# Altium PCB micromouse_v1.PcbDoc
Units mm, origin at the board's own origin, x right, y up, seen from the top; angles counter-clockwise.
Board outline 113.41 x 84.33 mm, 2 copper layers (Top Layer, Bottom Layer); 27 components, 49 nets, 128 pads, 21 vias.
Unrouted connection lines stored in the file: 73.
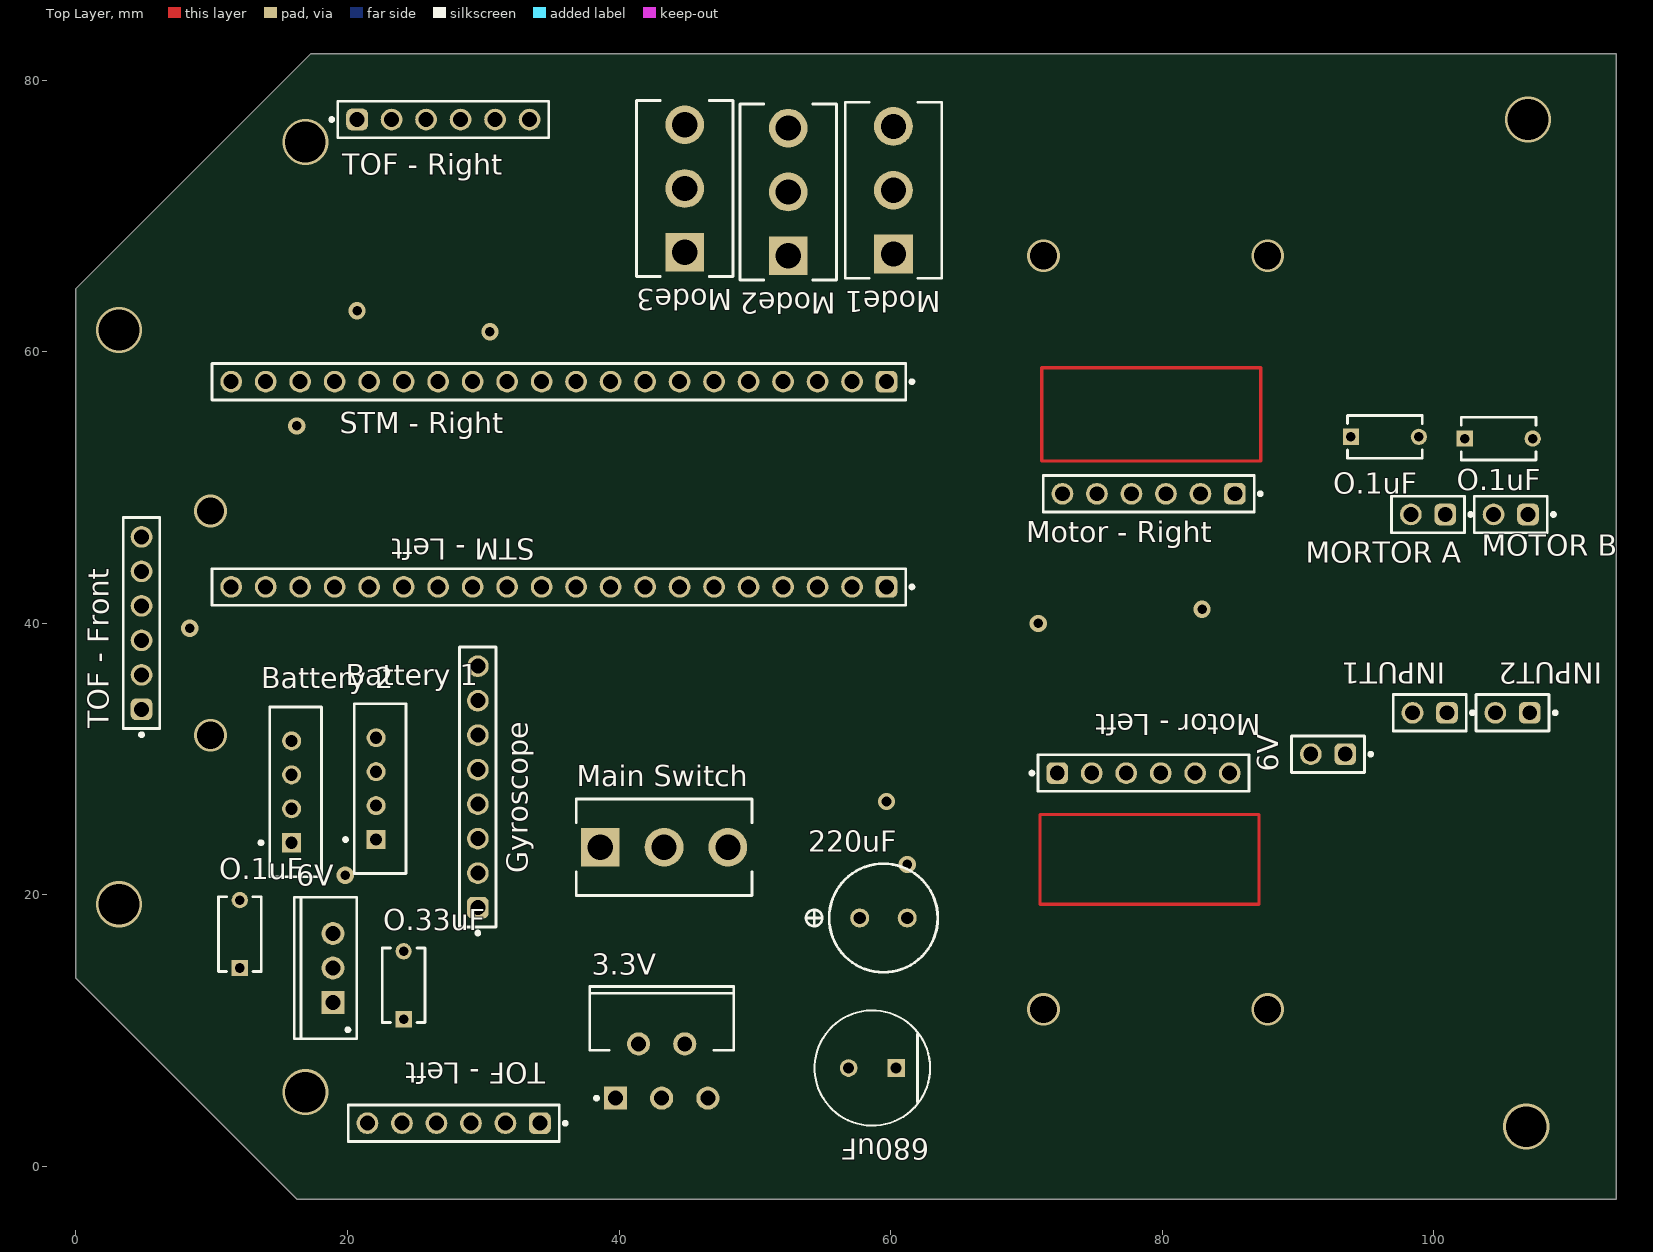
[diagram p0: Top Layer view]
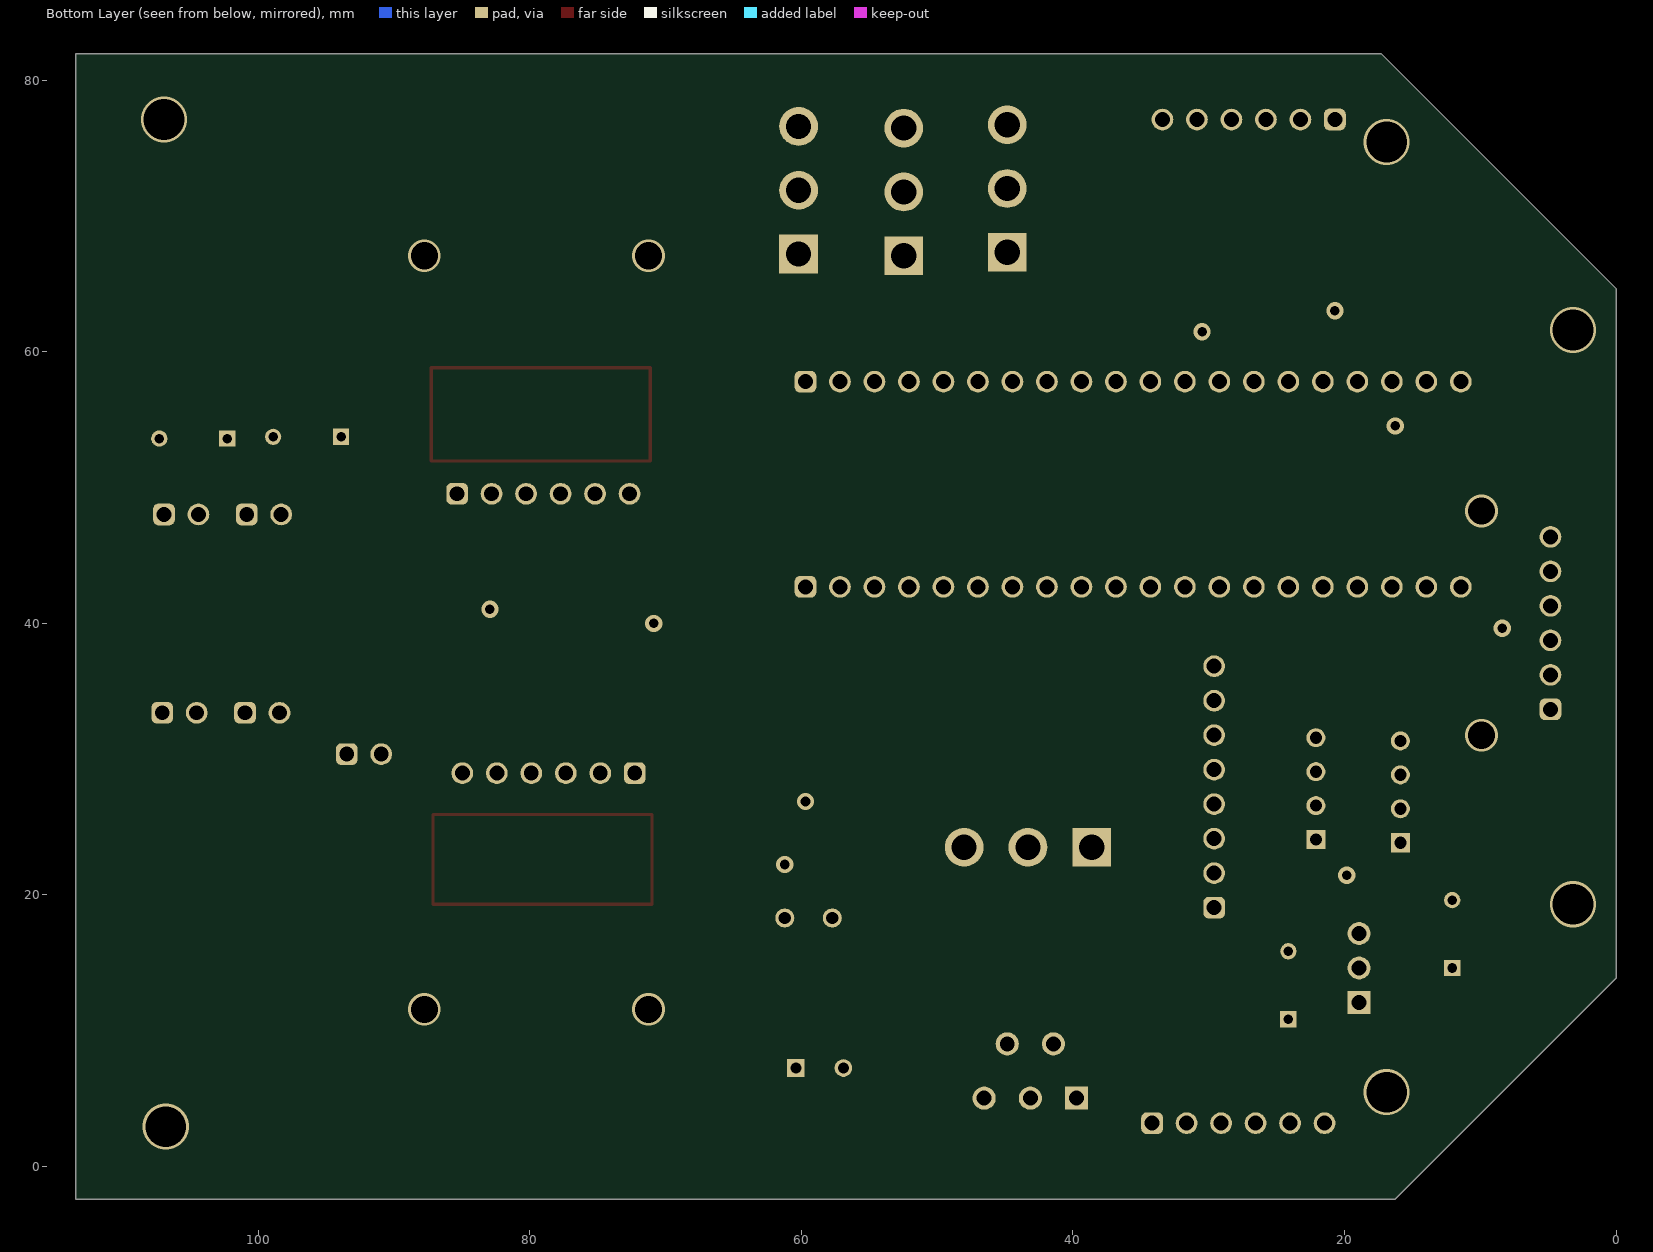
[diagram p1: Bottom Layer view, seen from below]

## Layer stack, top to bottom
Top Solder: solder mask 0.0102, Solder Resist, Dk 3.5
Top Layer: signal copper 0.0356
Dielectric 1: dielectric 0.32, FR-4, Dk 4.8
Bottom Layer: signal copper 0.0356
Bottom Solder: solder mask 0.0102, Solder Resist, Dk 3.5

## Board outline
16.256,-2.413 113.411,-2.413 113.411,81.915 17.272,81.915 0,64.643 0,13.843

## Design rules (kind name [scope] priority, off if disabled: settings)
Clearance [All] p1: gap=0.254 ignorepadtopadclearanceinfootprint=FALSE ismatrix=TRUE
PolygonConnect [All] p1: connectstyle=Relief reliefconductorwidth=0.254 reliefentries=4 polygonreliefangle="90 Angle" airgapwidth=0.254
RoutingVias [All] p1: holewidth=0.711 width=1.27 viastyle="Through Hole" minholewidth=0.711 minwidth=1.27 maxholewidth=0.711 maxwidth=1.27
SolderMaskExpansion [All] p1: expansion=0.102 istentingtop=FALSE
Width MaxMinWidth_2 [All] p1: maxlimit=1.3 minlimit=1.3 preferedwidth=1.3 minimp=50.000000 maximp=50.000000 favimp=50.000000
30 further rules are at their usual default settings.

## Components (designator, comment, footprint, x,y, rotation, side; value= is the part's Value field where it differs from the comment)
3.3V "LM2596T-3.3" T05D 43.131,7.017 r0 top
6V "P" 61300211121 92.202,30.353 r180 top
6V "L7806CV" TO220 18.923,14.605 r90 top
220uF "EEU-FR1C102L" PNSC-FR-A-8X20-2_V 59.464,18.288 r0 top
680uF "EEUFR1A681" FP-RAD-TH-D_8_0_5-L_11_5-MFG 58.646,7.239 r180 top
"Battery 1" "B4B-EH-A(LF)(SN)" JST-B4B-EH-A_V 22.098,27.813 r90 top
"Battery 2" "B4B-EH-A(LF)(SN)" JST-B4B-EH-A_V 15.875,27.579 r90 top
Gyroscope "Gyro" 61300811121 29.591,27.94 r90 top
INPUT1 "61300211121" 61300211121 99.695,33.401 r180 top
INPUT2 "61300211121" 61300211121 105.791,33.401 r180 top
"Main Switch" "A101SYCB04" FP-A101SYCB04-MFG 43.307,23.495 r90 top
Mode1 "A101SYCB04" FP-A101SYCB04-MFG 60.198,71.882 r180 top
Mode2 "A101SYCB04" FP-A101SYCB04-MFG 52.451,71.755 r180 top
Mode3 "A101SYCB04" FP-A101SYCB04-MFG 44.831,72.009 r180 top
"MORTOR A" "61300211121" 61300211121 99.568,48.006 r180 top
"Motor - Left" "ML" 61300611121 78.613,28.956 r0 top
"Motor - Right" "MR" 61300611121 78.994,49.53 r180 top
"MOTOR B" "61300211121" 61300211121 105.664,48.006 r180 top
O.1uF "RCER72A105K2M1H03A" FP-RCE2K1-MFG 12.065,17.105 r90 top
O.1uF "ML Cap" FP-RCE2K1-MFG 96.393,53.721 r0 top
O.1uF "MR Cap" FP-RCE2K1-MFG 104.775,53.594 r0 top
O.33uF "RCER72A105K2M1H03A" FP-RCE2K1-MFG 24.13,13.335 r90 top
"STM - Left" "61302011121" 61302011121 35.56,42.672 r180 top
"STM - Right" "61302011121" 61302011121 35.56,57.785 r180 top
"TOF - Front" "TF" 61300611121 4.826,40.005 r90 top
"TOF - Left" "TL" 61300611121 27.813,3.175 r180 top
"TOF - Right" "TR" 61300611121 27.051,77.089 r0 top

## Footprints (in the part's own frame and the unit in brackets; to place one, negate y for a bottom-side part, rotate by r counter-clockwise, add the part's x,y. Pads: shape width x height; smd on the part's side, far side on the other; paste and mask are expansions set on the pad)
61300211121 [mm] "Pin Header, pitch 2.54 mm, THT, Vertical, single row, 2p"
  rrect50% 1.6x1.6 hole 1.1: 1(-1.27,0)
  round 1.6 hole 1.1: 2(1.27,0)
  silkscreen extent -3.26,-1.35 2.69,1.35, body extent -2.54,-1.27 2.54,1.27, height 8.57
61300611121 [mm] "Pin Header, pitch 2.54 mm, THT, Vertical, single row, 6p"
  rrect50% 1.6x1.6 hole 1.1: 1(-6.35,0)
  round 1.6 hole 1.1: 2(-3.81,0) 3(-1.27,0) 4(1.27,0) 5(3.81,0) 6(6.35,0)
  silkscreen extent -8.34,-1.35 7.77,1.35, body extent -7.62,-1.27 7.62,1.27, height 8.57
61300811121 [mm] "Pin Header, pitch 2.54 mm, THT, Vertical, single row, 8p"
  rrect50% 1.6x1.6 hole 1.1: 1(-8.89,0)
  round 1.6 hole 1.1: 2(-6.35,0) 3(-3.81,0) 4(-1.27,0) 5(1.27,0) 6(3.81,0) 7(6.35,0) 8(8.89,0)
  silkscreen extent -10.88,-1.35 10.31,1.35, body extent -10.16,-1.27 10.16,1.27, height 8.57
61302011121 [mm] "Pin Header, pitch 2.54 mm, THT, Vertical, single row, 20p"
  rrect50% 1.6x1.6 hole 1.1: 1(-24.13,0)
  round 1.6 hole 1.1: 2(-21.59,0) 3(-19.05,0) 4(-16.51,0) 5(-13.97,0) 6(-11.43,0) 7(-8.89,0) 8(-6.35,0) 9(-3.81,0) 10(-1.27,0) 11(1.27,0) 12(3.81,0) 13(6.35,0) 14(8.89,0) 15(11.43,0) 16(13.97,0) 17(16.51,0) 18(19.05,0) 19(21.59,0) 20(24.13,0)
  silkscreen extent -26.12,-1.35 25.55,1.35, body extent -25.4,-1.27 25.4,1.27, height 8.57
FP-A101SYCB04-MFG [mil]
  rect 112.37x112.37 hole 73 paste-99999 mask+0: 1(0,185)
  round 112.37 hole 73 paste-99999 mask+0: 2(0,0) 3(0,-185)
  silkscreen extent -140,-255 140,255, body extent -144,-259 144,259, height 10
FP-RAD-TH-D_8_0_5-L_11_5-MFG [mm]
  rect 1.3x1.3 hole 0.8 paste-2539.97 mask+0: 1(-1.75,0)
  round 1.3 hole 0.8 paste-2539.97 mask+0: 2(1.75,0)
  silkscreen extent -4.25,-4.25 4.25,4.25, body extent -4.35,-4.35 4.35,4.35, height 0.25
FP-RCE2K1-MFG [mm]
  rect 1.2x1.2 hole 0.7 paste-2539.97 mask+0: 1(-2.5,0)
  round 1.2 hole 0.7 paste-2539.97 mask+0: 2(2.5,0)
  silkscreen extent -2.75,-1.58 2.75,1.58, body extent -3.2,-1.68 3.2,1.68, height 0.25
JST-B4B-EH-A_V [mm] "Header, 4-Leads, Body 12.5x3.8mm, Pitch 2.5mm"
  rect 1.4x1.4 hole 0.9: 1(-3.75,0)
  round 1.4 hole 0.9: 2(-1.25,0) 3(1.25,0) 4(3.75,0)
  silkscreen extent -6.25,-2.2 6.25,2.37, body extent -6.25,-2.2 6.25,1.6, height 6
PNSC-FR-A-8X20-2_V [mm] "Radial Lead, 2-Leads, Dia 8mm, Body Length 22mm, Pin Spacing 3.5mm"
  round 1.4 hole 0.9: 1(-1.75,0) 2(1.75,0)
  silkscreen extent -5.7,-4 4,4, body extent -3.97,-3.99 4,3.99, height 22
T05D [mm] "TO, Thru-Hole, Vertical, Heatsink Mounted; 5 Bent Staggered Leads; Pitch 1.7 mm"
  rect 1.7x1.7 hole 1.1: 1(-3.4,-2)
  round 1.7 hole 1.1: 2(-1.7,2) 3(0,-2) 4(1.7,2) 5(3.4,-2)
  silkscreen extent -5.3,-2.12 5.3,6.23, body extent -5.35,-2.31 5.35,6.28, height 21.1
TO220 [mm] "TO, Thru-Hole, Vertical, Heatsink Mounted; 3 In-Line Leads; Pitch 2.54 mm"
  rect 1.7x1.7 hole 1.1: 1(-2.54,0)
  round 1.7 hole 1.1: 2(0,0) 3(2.54,0)
  silkscreen extent -5.2,-1.75 5.2,2.85, body extent -5.25,-1.8 5.25,2.9, height 19.7

## Part data
3.3V: library part CMP-0069-01929-2, "SIMPLE SWITCHER® Power Converter 150 KHz 3A Step-Down Voltage Regulator, 5-pin TO-220", Manufacturer="National Semiconductor", PackageTopMarking="NSUZXYTTE#*LM2596T*-3.3 P+", PowerWise=N, ComponentLink1Description="LM2596 Datasheet", ComponentLink1URL=http://www.national.com/ds/LM/LM2596.pdf, ComponentLink2Description="LM2596 Web Page", ComponentLink2URL=http://www.national.com/pf/LM/LM2596.html, ComponentLink3Description="T05D Package Page", ComponentLink3URL=http://www.national.com/packaging/folders/t05d.html, CompType=Switcher, DatasheetVersion=May-2002, PackageDescription="TO-220, Molded, Stagger Bend, 5 Lead", PackageReference=T05D, PackageVersion="revA, Oct-1989", PinCount=5, RevisionNote="Component URLs added", RoHS=N
6V INPUT1 INPUT2 "MORTOR A" "MOTOR B": library part CMP-1712-00002-6, Color=Black, Contact Resistance=20mΩ, Current Rating=3A, Max Operating Temperature=125°C, Min Operating Temperature=-40°C, Operating Supply Voltage=250V, Connector Type="Male Pin", Contact Gender=Male, Contact Material=Copper, Contact Mating Length=5.9944mm, Contact Plating=Gold, Gender=Male, Height=8.94mm, Housing Material=PBT, Lead Free="Lead Free", Lead Pitch=2.54mm, Mount="Through Hole", NexarPartId=20081794, Number of Contacts=2, Number of Pins=2, Number of Positions=2, Number of Rows=1, Orientation=Vertical, Packaging=Bulk, Pitch=2.54mm, REACH SVHC="No SVHC", RoHS=Compliant, Termination="Through Hole", Voltage Rating=250V
6V: library part CMP-0244-00495-1, "Positive Voltage Regulator, 6V, 3-Pin TO-220", ComponentLink1Description="Manufacturer URL", ComponentLink1URL=http://www.st.com, ComponentLink2Description=Datasheet, ComponentLink2URL=http://www.st.com/internet/com/TECHNICAL_RESOURCES/TECHNICAL_LITERATURE/DATASHEET/CD00000444.pdf, ComponentLink3Description="Package Specification", ComponentLink3URL=http://www.st.com/internet/com/TECHNICAL_RESOURCES/TECHNICAL_LITERATURE/PACKAGE_INFORMATION/CD00004649.pdf, DatasheetVersion=16/11/2011, PackageDescription="TO, Thru-Hole, Vertical, Heatsink Mounted; 3 In-Line Leads; Pitch 2.54 mm", PackageReference=TO220, PackageVersion=ver3.0
220uF: library part CMP-0744-00002-1, "Aluminum Electrolytic Capacitor, 1000 uF +/- 20%, 16 V, -40 to 105 degC, 2-Pin THD, Dia 8 mm, Body Length 22 mm, RoHS", Capacitance="1000 uF", Manufacturer=Panasonic, Rated Ripple Current="1560 mA", Rated Voltage="16 V", Resistance="0.03 Ohm", Temperature Range="-40 to 105 degC", Tolerance="+/- 20%", ComponentLink1Description="Manufacturer URL", ComponentLink1URL=http://www.panasonic.com/industrial/electronic-components/, ComponentLink2Description=Datasheet, ComponentLink2URL=http://www.panasonic.com/industrial/includes/pdf/EEU-FR_DataSheet.pdf, DatasheetVersion=Apr-10, Mounting Technology="Through Hole", PackageDescription="2-Pin Radial Lead, Dia 8 mm, Body Length 22 mm, Pin Spacing 3.5 mm", PackageReference=FR-A-8X20-2, PartNumber=EEU-FR1C102L, RoHS=TRUE
680uF: library part CMP-05427-000255-1, "Aluminum Electrolytic Capacitors (Radial Lead Type) 680uF ±20% 10V", Capacitance=680uF, Case/Package=Radial, ESR (Equivalent Series Resistance)=56mR, Max Operating Temperature=105°C, Min Operating Temperature=-40°C, Package Quantity=200, Ripple Current=950mA, Tolerance=20%, Voltage=10V, Construction=RADIAL, Contact Plating=Tin, Diameter=8mm, Height=11.5mm, Height - Seated (Max)=0.512inch, Impedance=56mR, Lead Diameter=0.6mm, Lead Free="Lead Free", Lead Pitch=3.5mm, Lead/Base Style=Straight, Length=11.5mm, Life (Hours)=6000Hour, Mount="Through Hole", Number of Pins=2, Packaging=Bulk, Radiation Hardening=No, REACH SVHC="No SVHC", Ripple Current (AC)=950mA, RoHS Compliant=Yes, Series=FR, Termination=Radial, Voltage Rating=10V, Voltage Rating (DC)=10V
"Battery 1" "Battery 2": library part CMP-2000-05904-1, "Male Header, Pitch 2.5 mm, 1 x 4 Position, Height 6 mm, Tail Length 3.2 mm, -25 to 85 degC, RoHS, Bulk", Manufacturer=JST, Package Description="Male Header, Pitch 2.5 mm, 1 x 4 Position, Height 6 mm, Tail Length 3.2 mm", Package Reference=B4B-EH-A, Datasheet URL=http://www.jst-mfg.com/product/pdf/eng/eEH.pdf, Datasheet Version=12/2012, Manufacturer URL=http://www.jst.com/home2.html, Mounting Technology=SurfaceMount, No of Positions=4, Pitch=2.5mm, Style/Orientation=StraightHeader/Plug, Termination=Crimp, Type=ShroudedHeader
Gyroscope: library part CMP-1502-01076-3, Color=Black, Contact Resistance=20mΩ, Current Rating=3A, Max Operating Temperature=105°C, Min Operating Temperature=-40°C, Operating Supply Voltage=250V, Connector Type="Male Pin", Contact Material=Copper, Contact Mating Length=5.9944mm, Contact Plating=Gold, Gender=Male, Height=8.54mm, Lead Pitch=2.54mm, Mount="Through Hole", NexarPartId=32855533, Number of Contacts=8, Number of Pins=8, Number of Positions=8, Number of Rows=1, Orientation=Vertical, Packaging=Bulk, Pitch=2.54mm, REACH SVHC=Unknown, RoHS=Compliant, Termination=Solder, Voltage Rating=250V
"Main Switch" Mode1 Mode2 Mode3: library part CMP-03408-000017-1, "SWITCH TOGGLE SPDT 0.4VA 20V", Actuator Color=Chrome, Contact Current Rating=400mA, Contact Resistance=10mR, Flammability Rating="UL94 V-1", Insulation Resistance=30MR, Max Operating Temperature=85°C, Max Voltage Rating (AC)=20V, Min Operating Temperature=-30°C, Package Quantity=100, Power Rating=400mW, Actuator Length=10.41mm, Actuator Material=Phenolic, Actuator Type="Standard Round", Contact Material=Copper, Contact Plating=Gold, Depth=6.86mm, Electrical Life=6000Cycles, ELV=Compliant, Illumination Type=Non-Illuminated, Lead Free="Lead Free", Max Voltage Rating (DC)=20V, Mount=Panel, Number of Poles=1, Number of Positions=2, Orientation=Straight, Packaging=Bulk, Radiation Hardening=No, REACH SVHC="No SVHC", RoHS Compliant=Yes, Series="Gemini A", Switch Function=On-On, Termination="PC Pins", Throw Configuration=SPDT, Voltage Rating (AC)=20V, Voltage Rating (DC)=20V
"Motor - Left" "Motor - Right" "TOF - Front" "TOF - Left" "TOF - Right": library part CMP-1502-01070-3, Color=Black, Contact Resistance=20mΩ, Current Rating=3A, Max Operating Temperature=105°C, Min Operating Temperature=-40°C, Operating Supply Voltage=250V, Connector Type="Male Pin", Contact Gender=Male, Contact Material=Copper, Contact Mating Length=5.9944mm, Contact Plating=Gold, Gender=Male, Height=8.89mm, Housing Material=PBT, Lead Free="Lead Free", Lead Pitch=2.54mm, Mount="Through Hole", NexarPartId=20084590, Number of Contacts=6, Number of Pins=6, Number of Positions=6, Number of Rows=1, Orientation=Vertical, Packaging=Bulk, Pitch=2.54mm, REACH SVHC=Unknown, RoHS=Compliant, Termination="Through Hole", Voltage Rating=250V
O.1uF O.1uF O.1uF O.33uF: library part CMP-06035-007361-1, "Cap Ceramic Monolithic 1uF 100V 10% Thru-Hole Bulk", Capacitance=1uF, Case/Package=Radial, Dielectric=X7R, Max Operating Temperature=125°C, Min Operating Temperature=-55°C, Package Quantity=2000, Ratings=AEC-Q200, Resistor Type=Ceramic, Tolerance=10%, Voltage Rating=100V, Height=4mm, Height - Seated (Max)=0.157inch, Lead Diameter=0.5mm, Lead Free="Lead Free", Lead Pitch=0.197inch, Lead/Base Style="Formed Leads", Length=0.217inch, Mount="Through Hole", Packaging="Tape and Reel", Termination=Radial, Voltage Rating (DC)=100V, Width=0.124inch
"STM - Left" "STM - Right": library part CMP-1502-01102-3, Color=Black, Contact Resistance=20mΩ, Current Rating=3A, Operating Supply Voltage=250V, Connector Type="Male Pin", Contact Material=Copper, Contact Mating Length=5.9944mm, Contact Plating=Gold, Gender=Male, Lead Pitch=2.54mm, Mount="Through Hole", NexarPartId=32855554, Number of Contacts=20, Number of Pins=20, Number of Positions=20, Number of Rows=1, Orientation=Vertical, Packaging=Bulk, Pitch=2.54mm, REACH SVHC=Unknown, RoHS=Compliant, Termination=Solder

## Via types
v1: diameter 1.27, hole 0.711, Top Layer to Bottom Layer, 9 vias
v2: diameter 3.4, hole 3, Top Layer to Bottom Layer, 6 vias
v3: diameter 2.4, hole 2, Top Layer to Bottom Layer, 6 vias

## Nets (pads, with @x,y where several pads share a name; then routed paths per layer and width w, separated by ;. In a path a pad name is that pad's centre, name@x,y a point inside that pad or via, vN(x,y) a via of type N, cw(c..) or ccw(c..) an arc to the next point about the centre after c; other vN are vias at no path point)
3.3V: "STM - Right.20"
3V3: 3.3V.2 3.3V.4 220uF.1 "Motor - Left.2" "Motor - Right.2" "STM - Left.3" "TOF - Front.6" "TOF - Left.6" "TOF - Right.6" Gyroscope.8
  other v1: 82.931,41.021 30.48,61.468
5V: "STM - Right.18"
6V: 6V.2@90.932,30.353 6V.3
AD0: Gyroscope.2
GND: 3.3V.5 6V.1@93.472,30.353 6V.2@18.923,14.605 220uF.2 680uF.1 "Battery 2.3" "Motor - Left.5" "Motor - Right.5" "STM - Left.1" "STM - Left.2" "STM - Right.19" "TOF - Front.5" "TOF - Left.5" "TOF - Right.5" Gyroscope.7 Mode1.3 Mode2.3 Mode3.3 O.1uF.2@12.065,19.605 O.33uF.2
  other v1: 61.214,22.225 59.69,26.869 8.382,39.624
INT: Gyroscope.1
M1L: "MORTOR A.2" "Motor - Left.6" O.1uF.1@93.893,53.721
M1R: "Motor - Right.6" "MOTOR B.2" O.1uF.1@102.275,53.594
M2L: "MORTOR A.1" "Motor - Left.1" O.1uF.2@98.893,53.721
M2R: "Motor - Right.1" "MOTOR B.1" O.1uF.2@107.275,53.594
"NetBattery 1_2": "Battery 1.2" "Main Switch.2"
PA0: "STM - Left.16" "TOF - Left.1"
  other v1: 19.834,21.436
PA1: "STM - Left.15" "TOF - Front.1"
PA2: "STM - Left.14" "TOF - Right.1"
  other v1: 16.256,54.527 20.701,63.007
PA3: "STM - Left.13"
PA4: "STM - Left.12"
PA5: "STM - Left.11"
PA6: "STM - Left.10"
PA7: "STM - Left.9"
PA8: "STM - Right.5" Mode1.2
PA9: "STM - Right.6" Mode2.2
PA10: "STM - Right.7" Mode3.2
PA11: "STM - Right.8"
PA12: "STM - Right.9"
PA15: "STM - Right.10" INPUT1.2
PB0: "STM - Left.8"
PB1: "STM - Left.7"
PB3: "STM - Right.11" INPUT1.1
PB4: "STM - Right.12" INPUT2.1
PB5: "STM - Right.13" INPUT2.2
PB6: "STM - Right.14" "TOF - Front.4" "TOF - Left.4" "TOF - Right.4"
PB7: "STM - Right.15" "TOF - Front.3" "TOF - Left.3" "TOF - Right.3"
PB8: "STM - Right.16"
PB9: "STM - Right.17"
PB10: "STM - Left.6" Gyroscope.6
PB11: "STM - Left.5" Gyroscope.5
PB12: "Motor - Left.4" "STM - Right.1"
PB13: "Motor - Left.3" "STM - Right.2"
  other v1: 70.866,39.984
PB14: "Motor - Right.4" "STM - Right.3"
PB15: "Motor - Right.3" "STM - Right.4"
PC13: "STM - Left.19"
PC14: "STM - Left.18"
PC15: "STM - Left.17"
RST: "STM - Left.4"
VB: "STM - Left.20"
VIN: 3.3V.1 6V.1@18.923,12.065 680uF.2 "Main Switch.3" O.33uF.1
XCL: Gyroscope.3
XDA: Gyroscope.4
pads on no net: 3.3V.3 "Battery 1.1" "Battery 1.3" "Battery 1.4" "Battery 2.1" "Battery 2.2" "Battery 2.4" "Main Switch.1" "TOF - Front.2" "TOF - Left.2" "TOF - Right.2" Mode1.1 Mode2.1 Mode3.1 O.1uF.1@12.065,14.605
copper on no net: | length 91.4
  Top Layer w0.254: 70.993,19.304 87.122,19.304 87.122,25.908 70.993,25.908 70.993,19.304 ; 71.12,51.943 87.249,51.943 87.249,58.801 71.12,58.801 71.12,51.943
  other v2: 106.807,2.921 16.891,5.461 3.175,19.304 3.175,61.595 16.891,75.438 106.934,77.089
  other v3: 71.247,11.557 87.757,11.557 9.906,31.75 9.906,48.26 71.247,67.056 87.757,67.056